# Altium PCB Mickeyboard2.PcbDoc
Units mil, origin at the board's own origin, x right, y up, seen from the top; angles counter-clockwise.
Board outline 7195 x 6215 mil, 2 copper layers (Top Layer, Bottom Layer); 44 components, 41 nets, 253 pads, 0 vias.
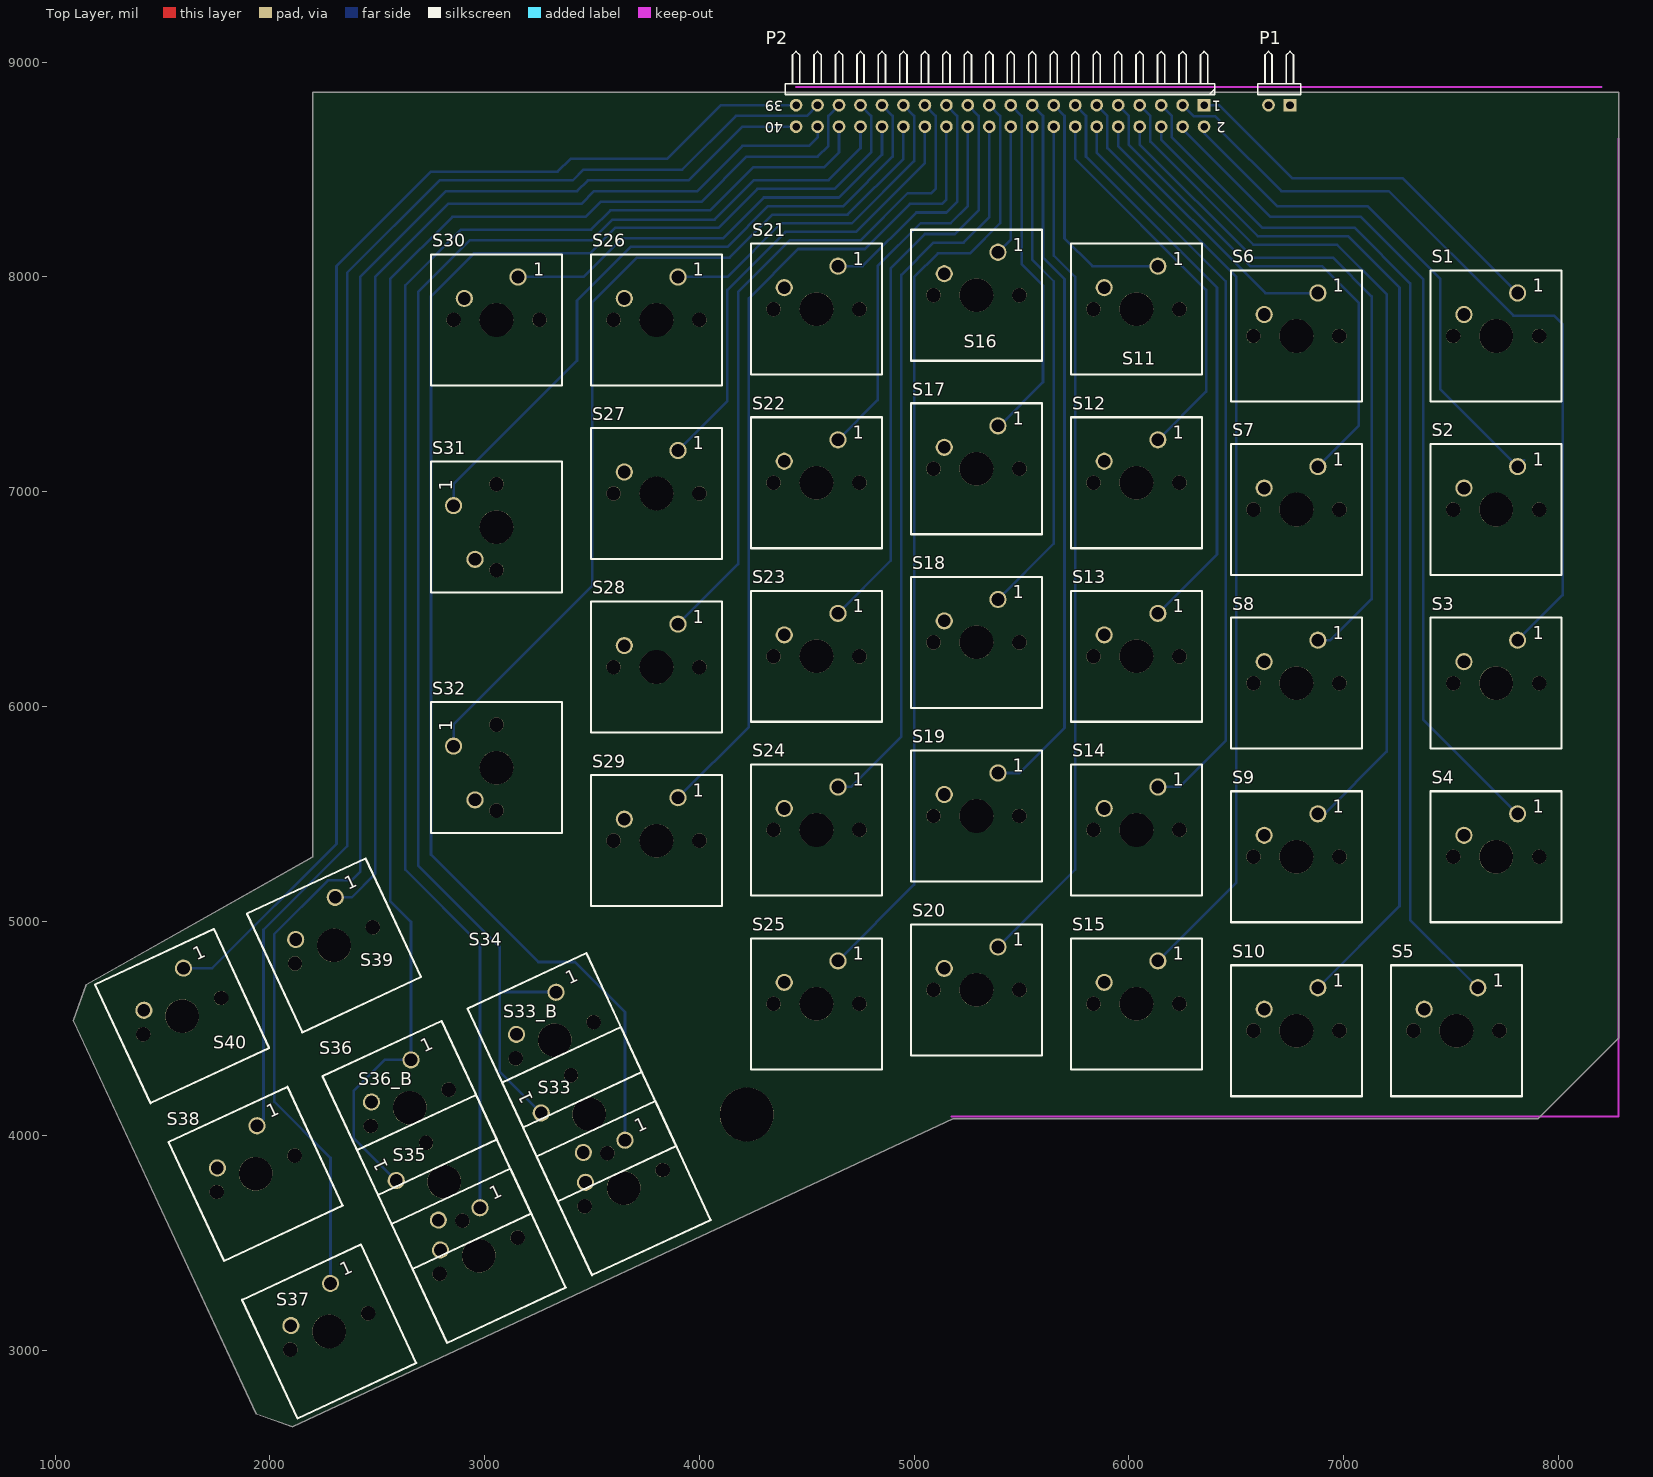
[diagram p0: Top Layer view]
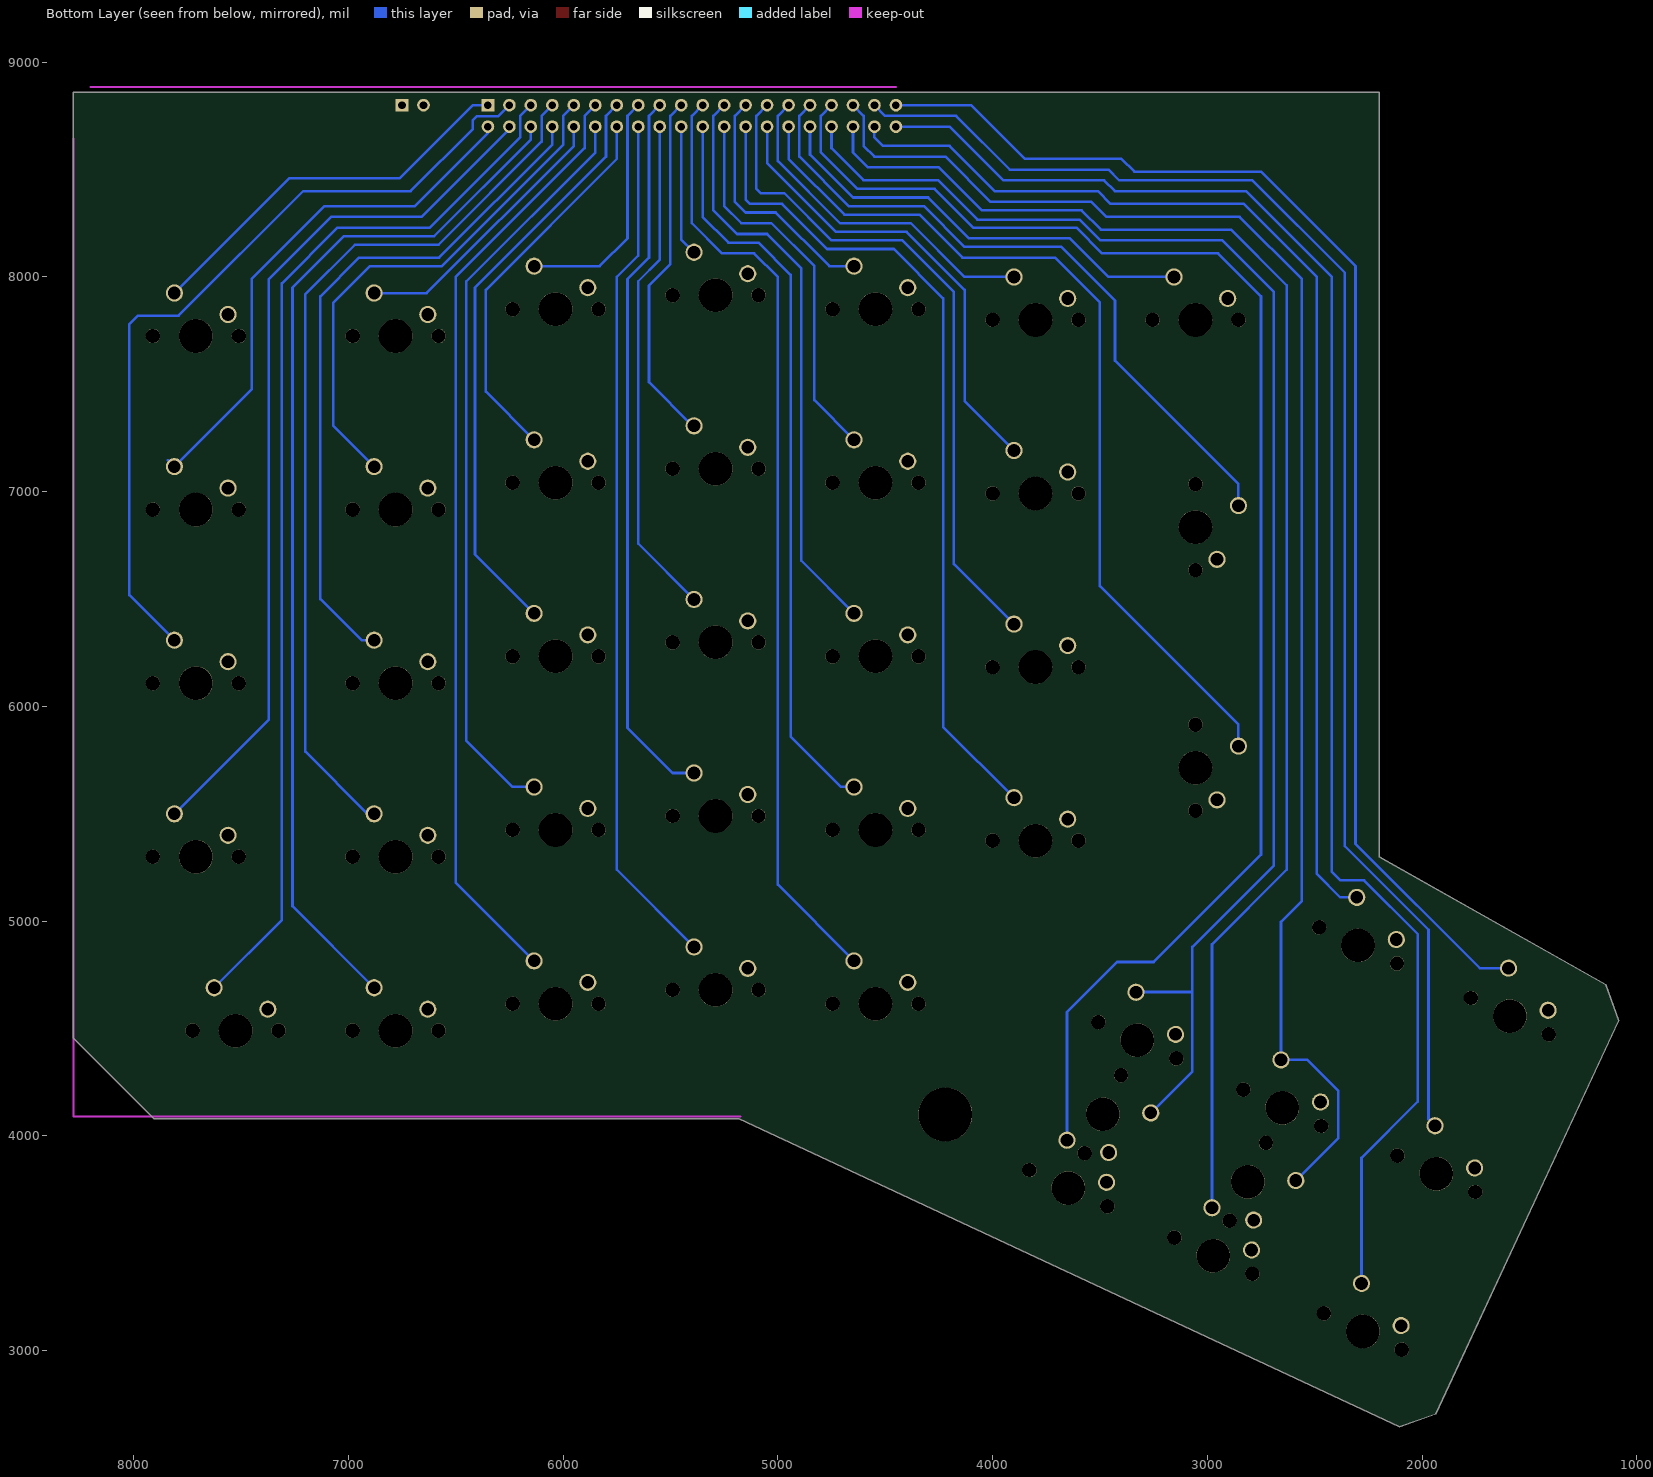
[diagram p1: Bottom Layer view, seen from below]

## Layer stack, top to bottom
Top Solder: solder mask 0.4, Solder Resist, Dk 3.5
Top Layer: signal copper 1.4
Dielectric 1: dielectric 12.6, FR-4, Dk 4.8
Bottom Layer: signal copper 1.4
Bottom Solder: solder mask 0.4, Solder Resist, Dk 3.5

## Board outline
2200,5300 1145,4705 1085,4535.93 1936.52,2705 2105,2645 5180,4080 7905,4080 8280,4455 8280,8860 2200,8860

## Design rules (kind name [scope] priority, off if disabled: settings)
Clearance [All] p1: gap=13 except(25: Track-Track)
HoleSize [All] p1: absolutevalues=TRUE maxlimit=100 minlimit=15 maxpercent=80.000 minpercent=20.000
PolygonConnect [All] p1: connectstyle=Relief reliefconductorwidth=10 reliefentries=4 polygonreliefangle="90 Angle" airgapwidth=10
RoomDefinition keyboard [InComponentClass('keyboard')] p1: confinementstyle=ConfineIn formatcopy=TRUE lockcomponents=FALSE outline 9000,6100 36460,6100 36460,8375 9000,8375
RoutingVias [All] p1 off: holewidth=32 width=62 viastyle="Through Hole" minholewidth=28 minwidth=50 maxholewidth=28 maxwidth=50
SolderMaskExpansion [All] p1: expansion=4
Width [All] p1: maxlimit=20 minlimit=12 preferedwidth=15
29 further rules are at their usual default settings.

## Components (designator, comment, footprint, x,y, rotation, side; value= is the part's Value field where it differs from the comment)
P1 "Header 2H" HDR1X2H 6750,8800 r180 top
P2 "Header 20X2H" HDR2X20H 6350,8800 r180 top
S1 "SW-SPST" CHERRYMXSWITCHNOLED 7710,7725 r0 top
S2 "SW-SPST" CHERRYMXSWITCHNOLED 7710,6916.67 r0 top
S3 "SW-SPST" CHERRYMXSWITCHNOLED 7710,6108.33 r0 top
S4 "SW-SPST" CHERRYMXSWITCHNOLED 7710,5300 r0 top
S5 "SW-SPST" CHERRYMXSWITCHNOLED 7525,4490 r0 top locked
S6 "SW-SPST" CHERRYMXSWITCHNOLED 6780,7725 r0 top
S7 "SW-SPST" CHERRYMXSWITCHNOLED 6780,6916.67 r0 top
S8 "SW-SPST" CHERRYMXSWITCHNOLED 6780,6108.33 r0 top
S9 "SW-SPST" CHERRYMXSWITCHNOLED 6780,5300 r0 top
S10 "SW-SPST" CHERRYMXSWITCHNOLED 6780,4490 r0 top
S11 "SW-SPST" CHERRYMXSWITCHNOLED 6035,7850 r0 top
S12 "SW-SPST" CHERRYMXSWITCHNOLED 6035,7041.67 r0 top
S13 "SW-SPST" CHERRYMXSWITCHNOLED 6035,6233.33 r0 top
S14 "SW-SPST" CHERRYMXSWITCHNOLED 6035,5425 r0 top
S15 "SW-SPST" CHERRYMXSWITCHNOLED 6035,4615 r0 top
S16 "SW-SPST" CHERRYMXSWITCHNOLED 5290,7915 r0 top
S17 "SW-SPST" CHERRYMXSWITCHNOLED 5290,7106.67 r0 top
S18 "SW-SPST" CHERRYMXSWITCHNOLED 5290,6298.33 r0 top
S19 "SW-SPST" CHERRYMXSWITCHNOLED 5290,5490 r0 top
S20 "SW-SPST" CHERRYMXSWITCHNOLED 5290,4680 r0 top
S21 "SW-SPST" CHERRYMXSWITCHNOLED 4545,7850 r0 top
S22 "SW-SPST" CHERRYMXSWITCHNOLED 4545,7041.67 r0 top
S23 "SW-SPST" CHERRYMXSWITCHNOLED 4545,6233.33 r0 top
S24 "SW-SPST" CHERRYMXSWITCHNOLED 4545,5425 r0 top
S25 "SW-SPST" CHERRYMXSWITCHNOLED 4545,4615 r0 top
S26 "SW-SPST" CHERRYMXSWITCHNOLED 3800,7800 r0 top
S27 "SW-SPST" CHERRYMXSWITCHNOLED 3800,6991.67 r0 top
S28 "SW-SPST" CHERRYMXSWITCHNOLED 3800,6183.33 r0 top
S29 "SW-SPST" CHERRYMXSWITCHNOLED 3800,5375 r0 top
S30 "SW-SPST" CHERRYMXSWITCHNOLED 3055,7800 r0 top locked
S31 "SW-SPST" CHERRYMXSWITCHNOLED 3055,6835 r90 top locked
S32 "SW-SPST" CHERRYMXSWITCHNOLED 3055,5715 r90 top locked
S33 "SW-SPST" CHERRYMXSWITCHNOLED 3647.22,3756.62 r25 top
S33_B "SW-SPST" CHERRYMXSWITCHNOLED 3486.63,4101.02 r115 top
S34 "SW-SPST" CHERRYMXSWITCHNOLED 3326.03,4445.42 r25 top
S35 "SW-SPST" CHERRYMXSWITCHNOLED 2972.02,3441.77 r25 top
S36 "SW-SPST" CHERRYMXSWITCHNOLED 2650.83,4130.57 r25 top
S36_B "SW-SPST" CHERRYMXSWITCHNOLED 2811.43,3786.17 r115 top
S37 "SW-SPST" CHERRYMXSWITCHNOLED 2275.67,3089.47 r25 top
S38 "SW-SPST" CHERRYMXSWITCHNOLED 1933.35,3823.58 r25 top
S39 "SW-SPST" CHERRYMXSWITCHNOLED 2297.95,4887.34 r25 top
S40 "SW-SPST" CHERRYMXSWITCHNOLED 1591.03,4557.69 r25 top

## Footprints (in the part's own frame and the unit in brackets; to place one, negate y for a bottom-side part, rotate by r counter-clockwise, add the part's x,y. Pads: shape width x height; smd on the part's side, far side on the other; paste and mask are expansions set on the pad)
CHERRYMXSWITCHNOLED [mil] "Cherry Mx Switch  NO LED"
  round 80 hole 59: 1(100,200) 2(-150,100)
  round 67 hole 67: ""(-200,0) ""(200,0)
  round 157 hole 157 unplated: ""(0,0)
  silkscreen extent -305,-305 305,305
HDR1X2H [mm] "Connector; Header; 2 Position; Right Angle"
  rect 1.5x1.5 hole 0.9: 1(0,0)
  round 1.5 hole 0.9: 2(2.54,0)
  silkscreen extent -1.27,-6.35 3.81,-1.27
HDR2X20H [mm] "Connector; Header; 20x2 Position; Right Angle"
  rect 1.5x1.5 hole 0.9: 1(0,0)
  round 1.5 hole 0.9: 2(0,2.54) 3(2.54,0) 4(2.54,2.54) 5(5.08,0) 6(5.08,2.54) 7(7.62,0) 8(7.62,2.54) 9(10.16,0) 10(10.16,2.54) 11(12.7,0) 12(12.7,2.54) 13(15.24,0) 14(15.24,2.54) 15(17.78,0) 16(17.78,2.54) 17(20.32,0) 18(20.32,2.54) 19(22.86,0) 20(22.86,2.54) 21(25.4,0) 22(25.4,2.54) 23(27.94,0) 24(27.94,2.54) 25(30.48,0) 26(30.48,2.54) 27(33.02,0) 28(33.02,2.54) 29(35.56,0) 30(35.56,2.54) 31(38.1,0) 32(38.1,2.54) 33(40.64,0) 34(40.64,2.54) 35(43.18,0) 36(43.18,2.54) 37(45.72,0) 38(45.72,2.54) 39(48.26,0) 40(48.26,2.54)
  silkscreen extent -1.27,-6.35 49.53,-1.27

## Part data
P1: "Header, 2-Pin, Right Angle"
P2: "Header, 20-Pin, Dual row, Right Angle"
S1 S2 S3 S4 S5 S6 S7 S8 S9 S10 S11 S12 S13 S14 S15 S16 S17 S18 S19 S20 S21 S22 S23 S24 S25 S26 S27 S28 S29 S30 S31 S32 S33 S33_B S34 S35 S36 S36_B S37 S38 S39 S40: "Single-Pole, Single-Throw Switch"

## Free pads (board coordinates)
  round 250 hole 250: ""(4220,4100)

## Nets (pads, with @x,y where several pads share a name; then routed paths per layer and width w, separated by ;. In a path a pad name is that pad's centre, name@x,y a point inside that pad or via, vN(x,y) a via of type N, cw(c..) or ccw(c..) an arc to the next point about the centre after c; other vN are vias at no path point)
GND: P1.1 P1.2 pad. S1.2 S2.2 S3.2 S4.2 S5.2 S6.2 S7.2 S8.2 S9.2 S10.2 S11.2 S12.2 S13.2 S14.2 S15.2 S16.2 S17.2 S18.2 S19.2 S20.2 S21.2 S22.2 S23.2 S24.2 S25.2 S26.2 S27.2 S28.2 S29.2 S30.2 S31.2 S32.2 S33.2 S33_B.2 S34.2 S35.2 S36.2 S36_B.2 S37.2 S38.2 S39.2 S40.2
KEY0: P2.1 S1.1 | length 1822.4
  Bottom Layer w12: P2.1 6420,8800 6760,8460 7275,8460 S1.1
KEY1: P2.2 S2.1 | length 2476.5
  Bottom Layer w12: P2.2 6350,8670 6690,8330 7110,8330 7450,7990 7450,7476.67 S2.1 7840,7146.67
KEY2: P2.3 S3.1 | length 3774.6
  Bottom Layer w12: P2.3 6301.47,8748.53 6401.47,8748.53 6420,8730 6420,8690 6710,8400 7210,8400 7790,7820 7980,7820 8020,7780 8020,6518.33 S3.1
KEY3: P2.4 S4.1 | length 4092.2
  Bottom Layer w12: P2.4 6250,8690 6660,8280 7080,8280 7370,7990 7370,5940 S4.1
KEY4: P2.5 S5.1 | length 4972.9
  Bottom Layer w12: P2.5 6200,8750 6200,8650 6620,8230 7050,8230 7310,7970 7310,5005 S5.1
KEY5: P2.10 S6.1 | length 1303.7
  Bottom Layer w12: P2.10 5950,8610 6635,7925 S6.1
KEY6: P2.9 S7.1 | length 2422.4
  Bottom Layer w12: P2.9 6000,8750 6000,8614.64 6564.64,8050 6900,8050 7070,7880 7070,7306.67 S7.1
KEY7: P2.8 S8.1 | length 3195.3
  Bottom Layer w12: P2.8 6050,8616.97 6576.97,8090 6950,8090 7130,7910 7130,6500 6938.33,6308.33 S8.1
KEY8: P2.7 S9.1 | length 4154.9
  Bottom Layer w12: P2.7 6100,8750 6100,8630 6580,8150 6970,8150 7200,7920 7200,5790 6910,5500 S9.1
KEY9: P2.6 S10.1 | length 4873.2
  Bottom Layer w12: P2.6 6150,8640 6600,8190 7020,8190 7260,7950 7260,5070 S10.1
KEY10: P2.15 S11.1 | length 1129.6
  Bottom Layer w12: P2.15 5700,8750 5700,8180 5830,8050 S11.1
KEY11: P2.14 S12.1 | length 1804.2
  Bottom Layer w12: P2.14 5750,8550 6360,7940 6360,7466.67 S12.1
KEY12: P2.13 S13.1 | length 2754
  Bottom Layer w12: P2.13 5800,8750 5800,8560 6410,7950 6410,6708.33 S13.1
KEY13: P2.12 S14.1 | length 3512.6
  Bottom Layer w12: P2.12 5850,8580 6450,7980 6450,5840 6235,5625 S14.1
KEY14: P2.11 S15.1 | length 4405.4
  Bottom Layer w12: P2.11 5900,8750 5900,8600 6500,8000 6500,5180 S15.1
KEY15: P2.20 S16.1 | length 609.9
  Bottom Layer w12: S16.1 5450,8175 P2.20
KEY16: P2.19 S17.1 | length 1646.4
  Bottom Layer w12: S17.1 5396.67,7306.67 5600,7510 5600,7960 5500,8060 5500,8750 P2.19
KEY17: P2.18 S18.1 | length 2350.8
  Bottom Layer w12: S18.1 5650,6758.33 5650,7980 5550,8080 P2.18
KEY18: P2.17 S19.1 | length 3359.1
  Bottom Layer w12: S19.1 5490,5690 5700,5900 5700,7990 5600,8090 5600,8750 P2.17
KEY19: P2.16 S20.1 | length 4010.5
  Bottom Layer w12: S20.1 5750,5240 5750,8000 5650,8100 P2.16
KEY20: P2.25 S21.1 | length 1150
  Bottom Layer w12: S21.1 4760,8050 5010,8300 5150,8300 5200,8350 5200,8750 P2.25
KEY21: P2.24 S22.1 | length 1790.9
  Bottom Layer w12: S22.1 4830,7426.67 4830,8050 5030,8250 5170,8250 5250,8330 P2.24
KEY22: P2.23 S23.1 | length 2740.7
  Bottom Layer w12: S23.1 4890,6678.33 4890,8040 5050,8200 5190,8200 5300,8310 5300,8750 P2.23
KEY23: P2.22 S24.1 | length 3484.2
  Bottom Layer w12: S24.1 4705,5625 4940,5860 4940,8010 5090,8160 5230,8160 5350,8280 P2.22
KEY24: P2.21 S25.1 | length 4406.3
  Bottom Layer w12: S25.1 5000,5170 5000,8000 5110,8110 5260,8110 5400,8250 5400,8750 P2.21
KEY25: P2.29 S26.1 | length 1604.4
  Bottom Layer w12: S26.1 4130,8000 4380,8250 4710,8250 5000,8540 5000,8750 P2.29
KEY26: P2.28 S27.1 | length 2178
  Bottom Layer w12: S27.1 4130,7421.67 4130,7940 4400,8210 4730,8210 5050,8530 P2.28
KEY27: P2.27 S28.1 | length 3192.2
  Bottom Layer w12: S28.1 4180,6663.33 4180,7930 4420,8170 4750,8170 4970,8390 5080,8390 5100,8410 5100,8750 P2.27
KEY28: P2.26 S29.1 | length 3912.2
  Bottom Layer w12: S29.1 4230,5905 4230,7900 4460,8130 4770,8130 4980,8340 5130,8340 5150,8360 P2.26
KEY29: P2.32 S30.1 | length 2061.1
  Bottom Layer w12: S30.1 3460,8000 3640,8180 4110,8180 4300,8370 4650,8370 4850,8570 P2.32
KEY30: P2.31 S31.1 | length 3201.4
  Bottom Layer w12: S31.1 2855,7035 3430,7610 3430,7890 3680,8140 4130,8140 4320,8330 4670,8330 4900,8560 4900,8750 P2.31
KEY31: P2.30 S32.1 | length 4209.7
  Bottom Layer w12: S32.1 2855,5915 3500,6560 3500,7880 3710,8090 4140,8090 4340,8290 4690,8290 4950,8550 P2.30
KEY32: P2.33 S33.1 | length 6971.8
  Bottom Layer w12: S33.1 3653.33,4576.67 3420,4810 3250,4810 2750,5310 2750,7910 2950,8110 3490,8110 3610,8230 4090,8230 4270,8410 4630,8410 4800,8580 4800,8750 P2.33
KEY33: P2.34 S33_B.1 S34.1 | length 6760.4
  Bottom Layer w12: S33_B.1 3070,4300.23 3070,4670 ; S34.1 3331.08,4670 3070,4670 ; P2.34 4750,8600 4601.16,8451.16 4254.16,8451.16 4070,8267 3594.67,8267 3497.67,8170 2930,8170 2690,7930 2690,5260 3070,4880 3070,4670
KEY34: P2.36 S35.1 | length 6835.7
  Bottom Layer w12: S35.1 2978.13,4891.87 2630,5240 2630,7960 2890,8220 3495.35,8220 3585.35,8310 4050,8310 4250,8510 4580,8510 4650,8580 P2.36
KEY35: P2.35 S36.1 S36_B.1 | length 7009.9
  Bottom Layer w12: S36_B.1 2390,3990.18 2390,4210 2534.09,4354.09 S36.1 2656.94,4996.94 2560,5093.88 2560,7990 2850,8280 3470,8280 3540,8350 4010,8350 4220,8560 4550,8560 4600,8610 4600,8750 P2.35
KEY36: P2.40 S37.1 | length 7345.5
  Bottom Layer w12: S37.1 2281.78,3898.22 2020,4160 2020,4940 2270,5190 2380,5190 2420,5230 2420,8000 2820,8400 3430,8400 3480,8450 3950,8450 4200,8700 P2.40
KEY37: P2.37 S38.1 | length 6660.2
  Bottom Layer w12: S38.1 1970,4077.65 1970,4960 2360,5350 2360,8020 2790,8450 3410,8450 3460,8500 3920,8500 4170,8750 4500,8750 P2.37
KEY38: P2.38 S39.1 | length 5390.4
  Bottom Layer w12: S39.1 2380.86,5110.86 2490,5220 2490,8000 2830,8340 3450,8340 3510,8400 3990,8400 4200,8610 4510,8610 4550,8650 P2.38
KEY39: P2.39 S40.1 | length 6093.3
  Bottom Layer w12: S40.1 1731.22,4781.22 2310,5360 2310,8050 2750,8490 3340,8490 3400,8550 3850,8550 4100,8800 P2.39
pads on no net: S1. S2. S3. S4. S5. S6. S7. S8. S9. S10. S11. S12. S13. S14. S15. S16. S17. S18. S19. S20. S21. S22. S23. S24. S25. S26. S27. S28. S29. S30. S31. S32. S33. S33_B. S34. S35. S36. S36_B. S37. S38. S39. S40.

## Keep-outs
Keep-Out Layer:
  lines w10: 4450,8885 8200,8885 ; 5175,4090 8280,4090 8280,8645

## Silkscreen, mask and mechanical layers (free items; w line width, h text height)
Drill Drawing:
  text ".LEGEND" at 11525,4015 h60
  text "Drill Drawing." at 11640,3860 h60

## Dimensions
8280,8645 to 2200,8860 on Mechanical 1

## Text inside footprints (layer, text, board x,y; h text height)
P2: Top Overlay "2" at 6450,8720 h50 r180; Top Overlay "1" at 6430,8820 h50 r180; Top Overlay "39" at 4390,8820 h50 r180; Top Overlay "40" at 4390,8720 h50 r180
S1: Top Overlay "1" at 7880,7930 h60
S2: Top Overlay "1" at 7880,7121.67 h60
S3: Top Overlay "1" at 7880,6313.33 h60
S4: Top Overlay "1" at 7880,5505 h60
S5: Top Overlay "1" at 7695,4695 h60
S6: Top Overlay "1" at 6950,7930 h60
S7: Top Overlay "1" at 6950,7121.67 h60
S8: Top Overlay "1" at 6950,6313.33 h60
S9: Top Overlay "1" at 6950,5505 h60
S10: Top Overlay "1" at 6950,4695 h60
S11: Top Overlay "1" at 6205,8055 h60
S12: Top Overlay "1" at 6205,7246.67 h60
S13: Top Overlay "1" at 6205,6438.33 h60
S14: Top Overlay "1" at 6205,5630 h60
S15: Top Overlay "1" at 6205,4820 h60
S16: Top Overlay "1" at 5460,8120 h60
S17: Top Overlay "1" at 5460,7311.67 h60
S18: Top Overlay "1" at 5460,6503.33 h60
S19: Top Overlay "1" at 5460,5695 h60
S20: Top Overlay "1" at 5460,4885 h60
S21: Top Overlay "1" at 4715,8055 h60
S22: Top Overlay "1" at 4715,7246.67 h60
S23: Top Overlay "1" at 4715,6438.33 h60
S24: Top Overlay "1" at 4715,5630 h60
S25: Top Overlay "1" at 4715,4820 h60
S26: Top Overlay "1" at 3970,8005 h60
S27: Top Overlay "1" at 3970,7196.67 h60
S28: Top Overlay "1" at 3970,6388.33 h60
S29: Top Overlay "1" at 3970,5580 h60
S30: Top Overlay "1" at 3225,8005 h60
S31: Top Overlay "1" at 2850,7005 h60 r90
S32: Top Overlay "1" at 2850,5885 h60 r90
S33: Top Overlay "1" at 3714.66,4014.26 h60 r25
S33_B: Top Overlay "1" at 3228.99,4168.46 h60 r115
S34: Top Overlay "1" at 3393.47,4703.06 h60 r25
S35: Top Overlay "1" at 3039.46,3699.41 h60 r25
S36: Top Overlay "1" at 2718.27,4388.21 h60 r25
S36_B: Top Overlay "1" at 2553.79,3853.61 h60 r115
S37: Top Overlay "1" at 2343.1,3347.11 h60 r25
S38: Top Overlay "1" at 2000.78,4081.22 h60 r25
S39: Top Overlay "1" at 2365.38,5144.97 h60 r25
S40: Top Overlay "1" at 1658.46,4815.33 h60 r25